# Altium PCB superhet1.PcbDoc (part 5 of 5)
Units mm, origin at the board's own origin, x right, y up, seen from the top; angles counter-clockwise.
Board outline 77 x 100 mm, 4 copper layers (Top Layer, Internal Plane 1, Signal Layer 1, Bottom Layer), stack 0.778 mm thick; 440 components, 348 nets, 1672 pads, 2403 vias.
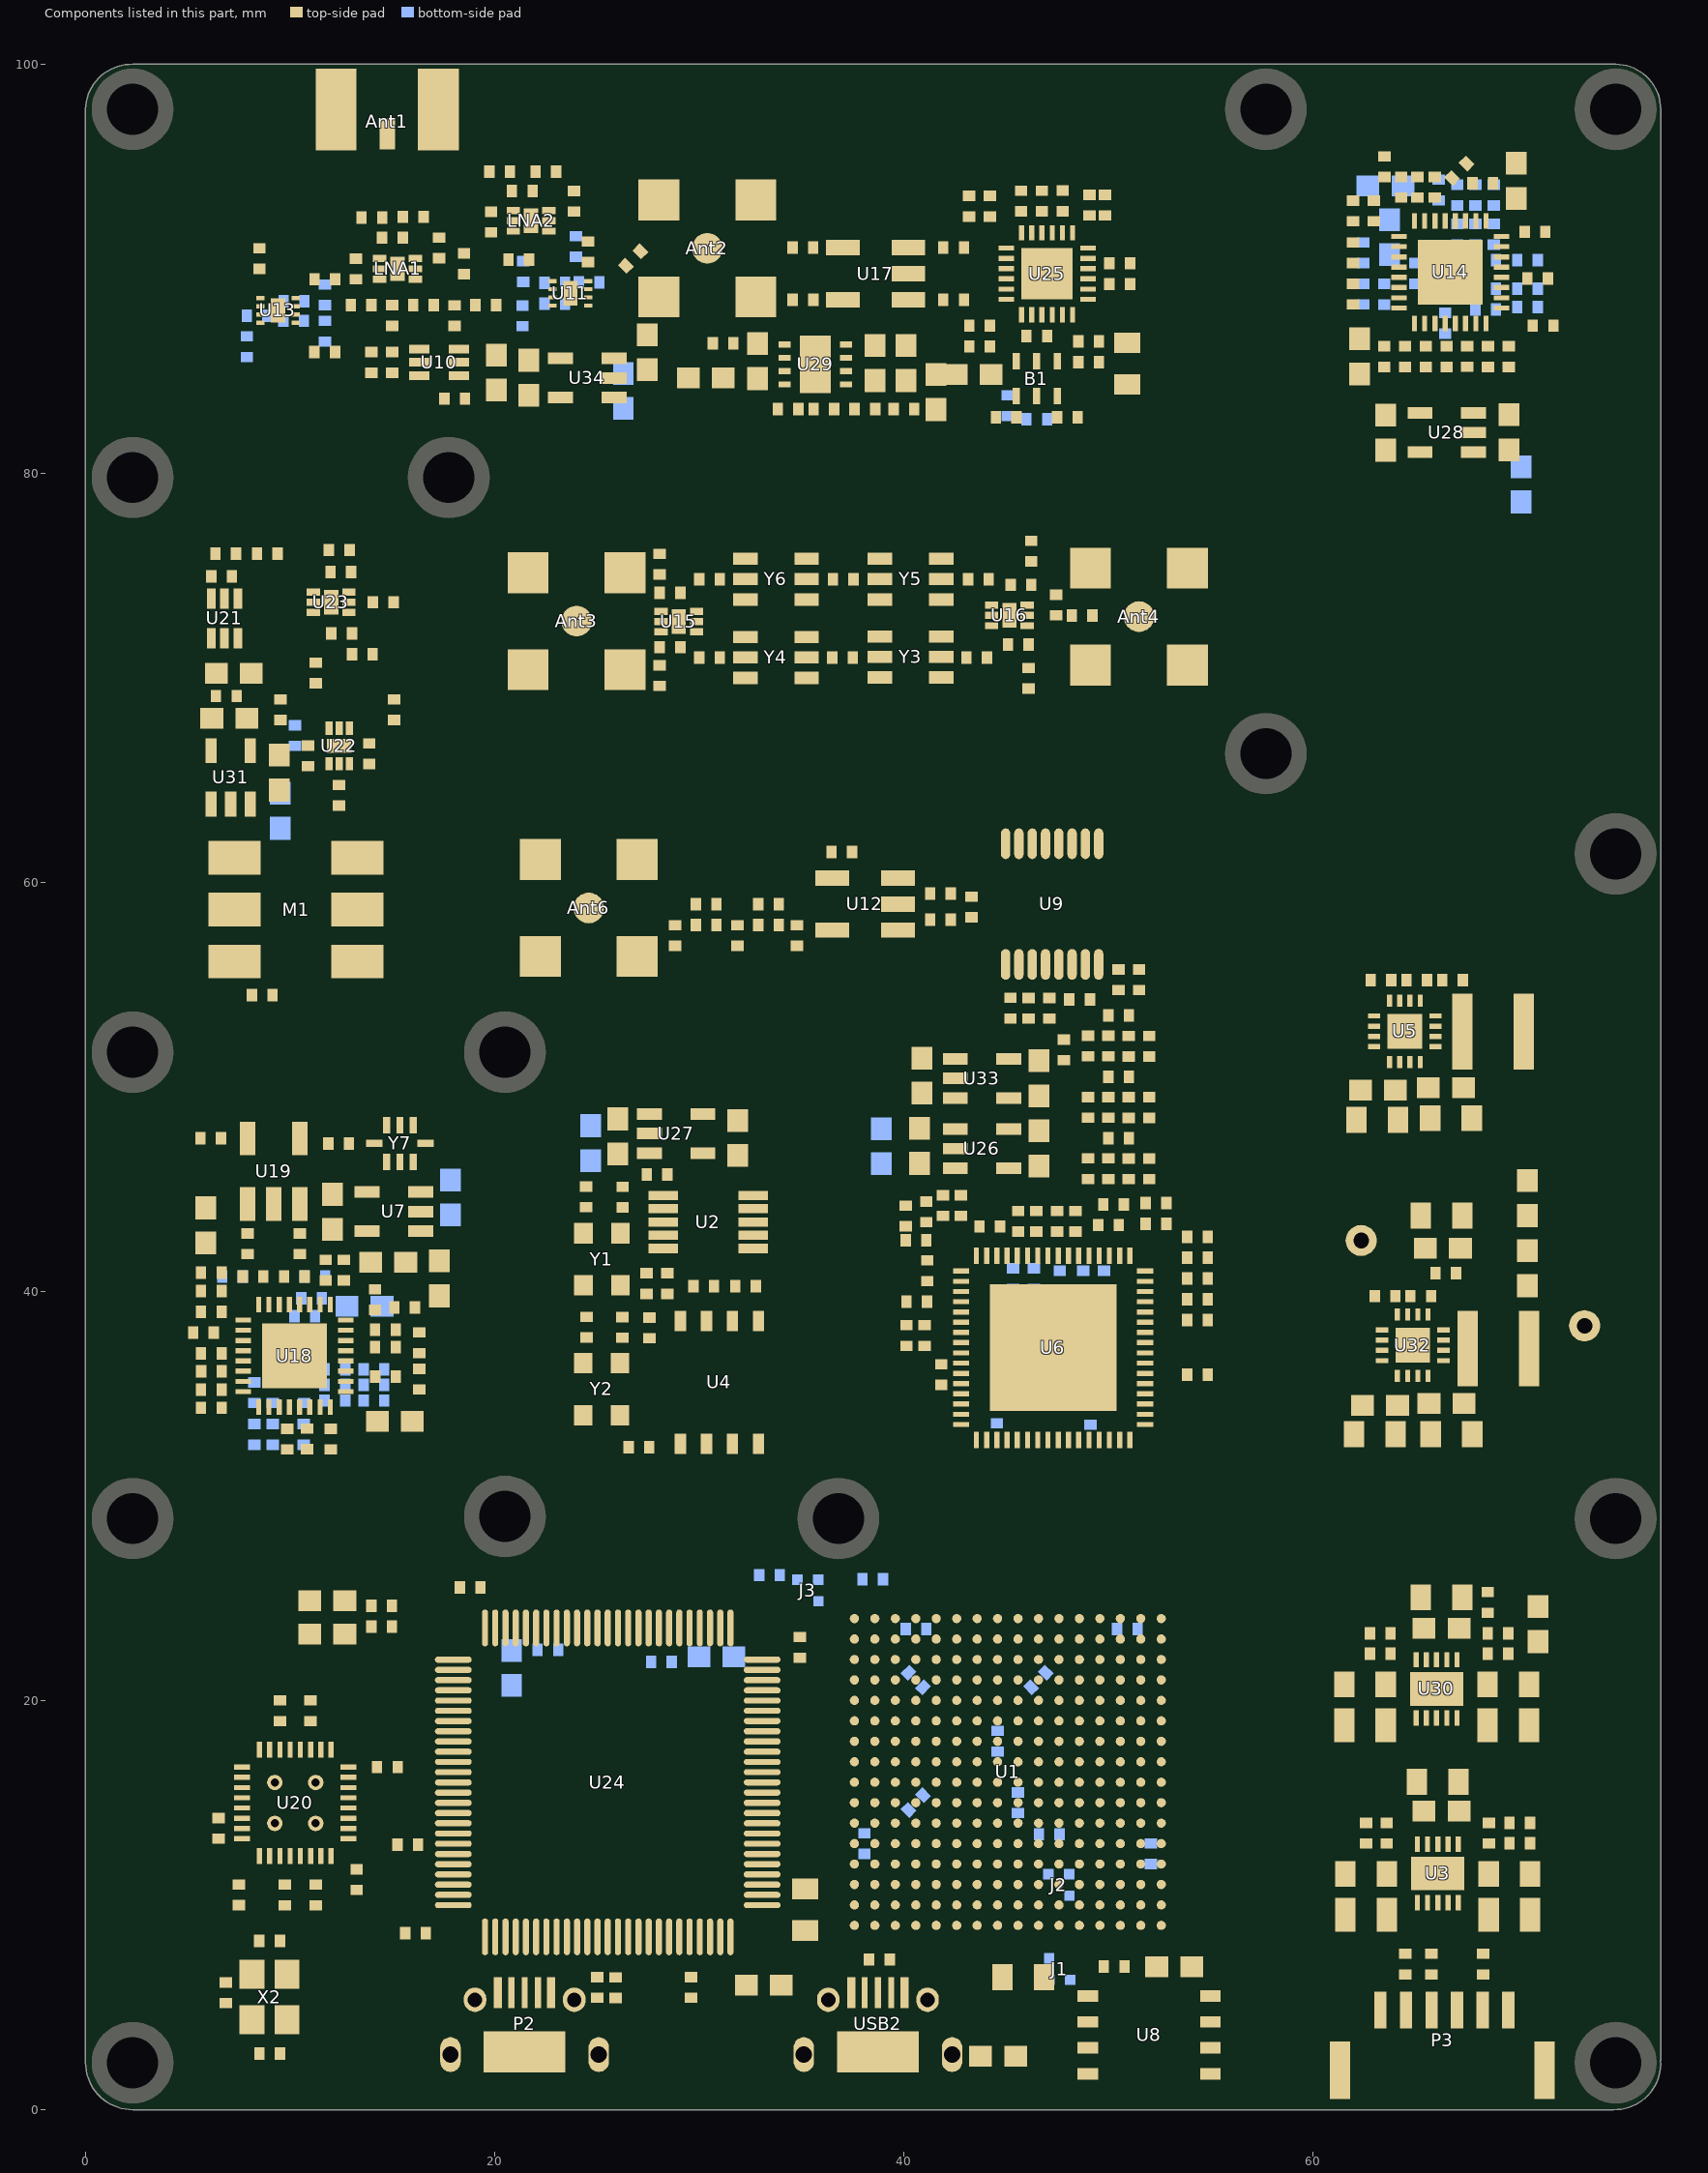
[diagram p7: the components of this part, seen from the top]

## Polygon pours and split planes (outlines as drawn) (continued)
GND on Internal Plane 1 (split plane): 2.289,99.49 2.289,99.491 2.3,99.49 13.233,99.49 13.233,95.987 16.256,95.987 16.256,99.49 74.8,99.49 74.813,99.491 74.966,99.483 75.13,99.459 75.291,99.419 75.447,99.363 75.597,99.292 75.74,99.206 75.873,99.108 75.996,98.996 76.108,98.873 76.206,98.74 76.292,98.597 76.363,98.447 76.419,98.291 76.459,98.13 76.483,97.966 76.491,97.813 76.49,97.8 76.49,2.445 76.485,2.4 76.488,2.366 76.486,2.366 76.492,2.25 76.484,2.079 76.459,1.91 76.417,1.744 76.36,1.583 76.286,1.429 76.199,1.282 76.097,1.145 75.982,1.018 75.855,0.903 75.718,0.801 75.571,0.714 75.417,0.64 75.256,0.583 75.09,0.541 74.921,0.516 74.75,0.508 74.711,0.51 74.711,0.509 74.7,0.51 2.3,0.51 2.286,0.509 2.124,0.517 1.95,0.543 1.78,0.586 1.614,0.645 1.455,0.72 1.305,0.81 1.163,0.915 1.033,1.033 0.915,1.163 0.81,1.305 0.72,1.455 0.645,1.614 0.586,1.78 0.543,1.95 0.517,2.124 0.509,2.286 0.51,2.3 0.51,97.8 0.51,97.801 0.516,97.921 0.541,98.09 0.583,98.256 0.64,98.417 0.714,98.571 0.801,98.718 0.903,98.855 1.018,98.982 1.145,99.097 1.282,99.199 1.429,99.286 1.583,99.36 1.744,99.417 1.91,99.459 2.079,99.484 2.25,99.492

## Keep-outs
Keep-Out Layer:
  lines w0.127: 76.996,2.4 cw(c74.75,2.25) 74.7,0 2.3,0 cw(c2.3,2.3) 0,2.3 0,97.8 cw(c2.25,97.75) 2.3,100 74.8,100 cw(c74.8,97.8) 77,97.8 77,2.4

## Other copper
Top Layer:
  rectangle net VSYS: 62.459,50.927 63.652,51.537
  rectangle net VSYS: 61.747,47.752 62.941,53.111
  rectangle net NetL12_1: 65.996,51.816 67.361,53.111
  rectangle net GND: 63.576,51.867 64.872,55.601
  rectangle net VSYS: 62.484,35.585 64.11,36.17
  rectangle net GND: 64.135,33.027 65.758,34.442
  rectangle net GND: 65.131,32.385 65.761,36.873
  rectangle net VSYS: 61.697,32.36 63.221,37.744
  rectangle net GND: 64.008,36.576 65.253,40.081
  rectangle net NetL11_1: 66.573,36.5 67.589,37.744
  region net GND: 73.025,63.5 59.944,63.5 59.944,59.25 73.025,59.25
  rectangle net GND: 3.505,77.75 60,82
  region net GND: 4.25,2.3 4.25,97.8 0.305,97.8 0.305,2.3
  region net GND: 76.784,2.3 76.784,97.8 72.75,97.8 72.75,2.3
  region net GND: 55.75,77.75 55.75,0.203 60,0.203 60,77.75
  rectangle net GND: 16.5,64.25 56.5,68.5
  rectangle net GND: 4.25,26.75 72.974,31
  region net GND: 22.606,31 22.606,50.25 18.669,50.25 18.669,31
  region net GND: 39,53.75 4.25,53.75 4.25,50.25 39,50.25
  region net GND: 34.75,50.25 34.75,31 39,31 39,50.25
  rectangle net GND: 18.212,96.5 74.8,99.797
  rectangle net GND: 2.4,96.5 11.25,99.797
  region net GND: 19.5,53.75 19.5,77.75 16,77.75 16,53.75
  region net GND: 60,81.915 60,96.5 55.75,96.5 55.75,81.915
Bottom Layer:
  region net GND: 73.228,30.937 4.191,30.937 4.191,26.687 73.228,26.687
  region net GND: 76.784,2.3 76.784,97.8 72.75,97.8 72.75,2.3
  rectangle net GND: 2.3,95.733 74.8,99.797
  region net GND: 4.25,2.3 4.25,97.8 0.305,97.8 0.305,2.3
Internal Plane 1 (plane layer: these items are gaps in the copper):
  rectangle: 13.233,95.987 16.256,100.025